# Altium PCB imx6_cpu_board.PcbDoc (part 6 of 9)
Units mil, origin at the board's own origin, x right, y up, seen from the top; angles counter-clockwise.
Board outline 2598.43 x 2362.2 mil, 8 copper layers (Top Layer, GND1, Signal Layer 1, POWER1, POWER2, Signal Layer 2, GND2, Bottom Layer), stack 66.304 mil thick; 354 components, 422 nets, 2180 pads, 1333 vias.
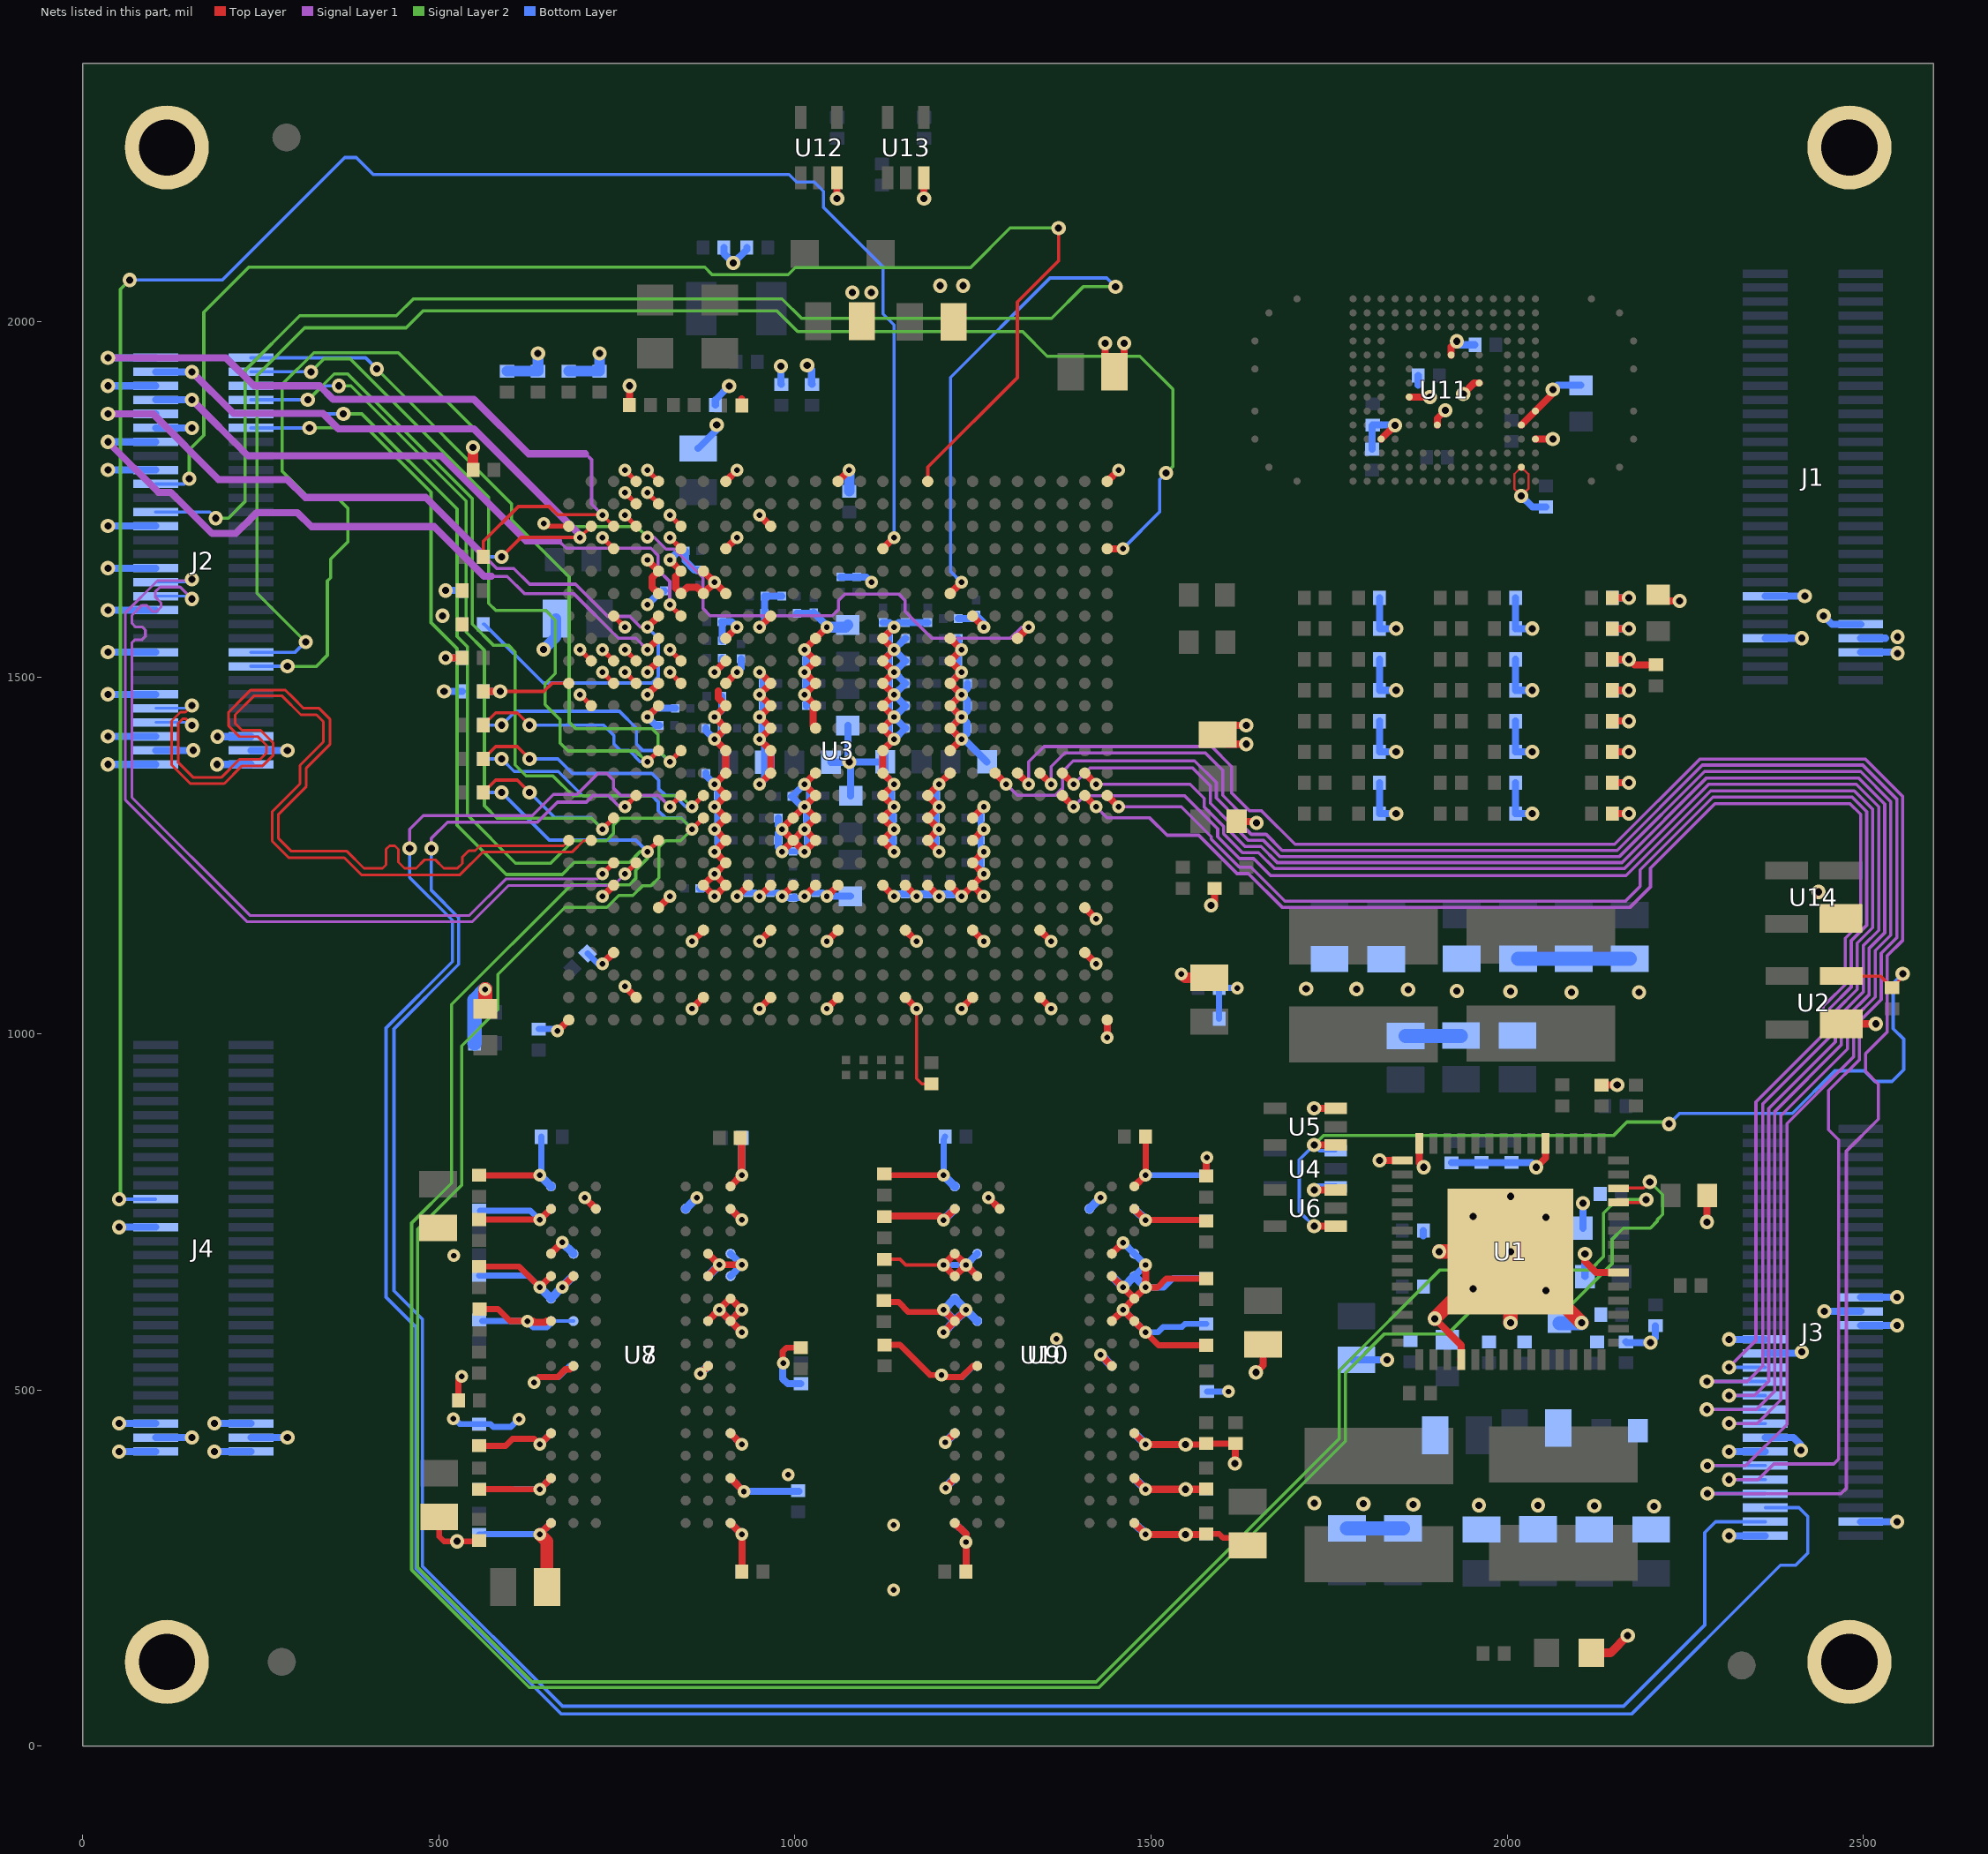
[diagram p12: the nets of this part, all layers, seen from the top]

## Via types
v1: diameter 18, hole 8, Top Layer to Bottom Layer, tented both sides, 768 vias
v2: diameter 20, hole 10, Top Layer to Bottom Layer, tented both sides, 565 vias

## Nets (pads, with @x,y where several pads share a name; then routed paths per layer and width w, separated by ;. In a path a pad name is that pad's centre, name@x,y a point inside that pad or via, vN(x,y) a via of type N, cw(c..) or ccw(c..) an arc to the next point about the centre after c; other vN are vias at no path point) (continued)
GND: C1.2 C2.2 C3.2 C4.2 C5.2 C6.2 C7.2 C9.2 C10.2 C11.2 C12.2 C13.2 C14.2 C15.2 C16.2 C17.2 C18.2 C19.2 C20.2 C21.2 C22.2 C23.2 C24.2 C25.2 C26.2 C27.2 C28.2 C29.2 C30.2 C31.2 C32.2 C33.2 C34.2 C35.2 C36.2 C37.1 C38.2 C39.2 C40.2 C41.2 C42.2 C43.2 C44.2 C45.2 C46.2 C47.2 C48.2 C49.2 C50.2 C51.2 C52.2 C53.2 C54.2 C55.2 C56.2 C57.2 C58.2 C59.2 C60.2 C61.2 C62.2 C63.2 C64.2 C65.2 C66.2 C67.2 C68.2 C69.2 C70.2 C71.2 C72.2 C73.2 C74.2 C75.2 C76.2 C77.2 C78.2 C79.2 C80.2 C81.2 C82.2 C83.2 C84.2 C85.2 C86.2 C87.2 C88.2 C89.2 C90.2 C91.2 C92.2 C93.2 C94.1 C95.2 C96.2 C97.2 C98.2 C99.2 C100.2 C101.2 C102.2 C103.2 C104.2 C105.2 C106.2 C107.2 C109.2 C110.2 C111.2 C112.1 C113.2 C114.2 C115.2 C116.2 C117.2 C118.2 C119.2 C120.2 C121.2 C122.2 C123.2 C124.2 C125.2 C126.2 C127.2 C128.2 C129.2 C130.2 C131.2 C132.2 C133.2 C134.2 C135.2 C136.2 C137.2 C138.2 C139.2 C140.2 C141.2 C142.2 C143.2 C144.2 C145.2 C146.2 C147.2 C148.2 C149.2 C150.2 C151.2 C152.2 C153.2 C154.2 C155.2 C156.2 C157.2 C158.2 C159.2 C160.2 C161.2 C162.2 C163.2 C164.2 C165.2 C166.2 C167.2 C168.2 C169.2 C170.2 C171.2 C172.2 C173.2 C174.2 C175.2 C176.2 C177.2 C178.2 C179.2 C180.2 C181.2 C182.2 C183.2 C184.2 C185.2 C186.2 C187.2 C188.2 C189.2 C190.2 C191.2 C192.2 C193.2 C194.2 C195.2 C196.2 C197.2 C198.2 C199.2 D1.2 J1.47 J1.52 J1.53 J1.54 J1.56 J2.5 J2.11 J2.17 J2.25 J2.31 J2.37 J2.43 J2.49 J2.55 J2.56 J2.57 J2.58 J2.59 J2.60 J3.26 J3.28 J3.30 J3.31 J3.33 J3.45 J3.47 J3.58 J3.59 J4.27 J4.55 J4.56 J4.57 J4.58 J4.59 J4.60 pad. pad.EndPad R4.1 R6.1 R13.2 R19.2 R20.2 R24.2 R25.1 R29.2 R30.1 R31.2 R32.2 R35.1 R36.1 R37.2 R38.2 R39.1 R40.2 R41.1 R64.1 R65.1 R66.1 R67.1 R68.2 R70.2 R72.2 R74.2 R76.2 R78.2 R80.2 R83.2 R85.2 R87.2 R89.2 R91.2 R93.2 R96.2 R98.2 R100.2 R102.2 R103.2 R104.2 R105.2 R107.2 R108.2 R109.2 R110.2 R111.2 R112.2 R113.2 R114.2 R115.2 R116.2 R117.2 R118.2 U1.5 U1.14 U1.15 U1.32 U1.48 U1.57 U2.1 U3.A4 U3.A5 U3.A8 U3.A13 U3.A25 U3.AA7 U3.AA10 U3.AA13 U3.AA16 U3.AA19 U3.AA22 U3.AB3 U3.AB24 U3.AD4 U3.AD7 U3.AD10 U3.AD13 U3.AD16 U3.AD19 U3.AD22 U3.AE1 U3.AE25 U3.B4 U3.B5 U3.C1 U3.C4 U3.C6 U3.C10 U3.D3 U3.D6 U3.D8 U3.E5 U3.E6 U3.E7 U3.F5 U3.F6 U3.F7 U3.F8 U3.G3 U3.G10 U3.G19 U3.H8 U3.H12 U3.H15 U3.H18 U3.J2 U3.J8 U3.J12 U3.J15 U3.J18 U3.K8 U3.K10 U3.K12 U3.K15 U3.K18 U3.L2 U3.L5 U3.L8 U3.L10 U3.L12 U3.L15 U3.L18 U3.M8 U3.M10 U3.M12 U3.M15 U3.M18 U3.N8 U3.N10 U3.N15 U3.N18 U3.P8 U3.P10 U3.P12 U3.P15 U3.P18 U3.R8 U3.R12 U3.R15 U3.R17 U3.T8 U3.T11 U3.T12 U3.T15 U3.T17 U3.T19 U3.U8 U3.U11 U3.U12 U3.U15 U3.U17 U3.U19 U3.V8 U3.V19 U3.W3 U3.W7 U3.W8 U3.W9 U3.W10 U3.W11 U3.W12 U3.W13 U3.W15 U3.W16 U3.W17 U3.W18 U3.W19 U3.Y5 U3.Y24 U4.3 U5.3 U6.3 U7.A9 U7.B1 U7.B3 U7.B9 U7.D1 U7.D8 U7.E1 U7.E2 U7.E8 U7.F9 U7.G1 U7.G8 U7.G9 U7.J2 U7.J8 U7.M1 U7.M9 U7.P1 U7.P9 U7.T1 U7.T9 U8.A9 U8.B1 U8.B3 U8.B9 U8.D1 U8.D8 U8.E1 U8.E2 U8.E8 U8.F9 U8.G1 U8.G8 U8.G9 U8.J2 U8.J8 U8.M1 U8.M9 U8.P1 U8.P9 U8.T1 U8.T9 U9.A9 U9.B1 U9.B3 U9.B9 U9.D1 U9.D8 U9.E1 U9.E2 U9.E8 U9.F9 U9.G1 U9.G8 U9.G9 U9.J2 U9.J8 U9.M1 U9.M9 U9.P1 U9.P9 U9.T1 U9.T9 U10.A9 U10.B1 U10.B3 U10.B9 U10.D1 U10.D8 U10.E1 U10.E2 U10.E8 U10.F9 U10.G1 U10.G8 U10.G9 U10.J2 U10.J8 U10.M1 U10.M9 U10.P1 U10.P9 U10.T1 U10.T9 U11.AA4 U11.AA6 U11.K4 U11.M7 U11.P5 U11.R10 U11.U8 U11.Y2 U11.Y5 U12.3 U13.3 U14.1 | length 18986.7
  Top Layer w3: 2009.89,1764.8 v2(2019.69,1755) 2029.49,1764.8 2029.49,1785.47 U11.Y2@2019.69,1795.27 2009.89,1785.47 2009.89,1764.8
  Top Layer w4.7: v1(1170.62,1035.14) 1170.62,937.1 1178.14,929.58 R40.2@1191.38,929.58
  Top Layer w5: C169.2@1125.38,683.1 1147.62,683.1 1155.4,675.32 v1(1208.65,675.32)
  Top Layer w7: v1(647.07,1716.16) 650.93,1712.3 U3.C1@682.43,1712.3 ; v1(698.17,1476.08) U3.L2@713.92,1460.33 ; v1(698.17,1539.07) U3.J2@713.92,1523.32 ; v1(729.67,1696.55) U3.D3@745.42,1680.8 ; U3.G3@745.42,1586.32 v1(761.17,1570.57) ; v1(761.17,1728.05) U3.C4@776.92,1712.3 ; v1(761.17,1759.55) U3.B4@776.92,1743.8 ; v1(761.17,1791.04) U3.A4@776.92,1775.29 ; v1(792.66,1759.55) U3.B5@808.41,1743.8 ; v1(792.66,1791.04) U3.A5@808.41,1775.29 ; v1(824.16,1696.55) U3.D6@839.91,1680.8 ; v1(824.16,1728.05) U3.C6@839.91,1712.3
  Top Layer w8: C184.2@500.38,321.63 500.38,294.13 507.17,287.34 v2(525.38,287.34) ; C136.2@1577.38,297.83 1595.38,297.83 1600.87,292.34 1624.67,292.34 C182.2@1635.38,281.63
  Top Layer w8.5: v2(525.38,287.34) 555.21,287.34 C149.2@556.45,288.58 ; C150.2@527.62,485.34 527.62,514.17 v1(532.33,518.89) ; C148.2@556.45,360.58 603.19,360.58 603.4,360.36 v1(641.72,360.36) ; C146.2@556.45,421.58 593.62,421.58 603.38,431.34 633.74,431.34 v1(641.72,423.36) ; C170.2@556.45,801.1 641.18,801.1 v1(641.64,801.56) ; C147.2@556.7,673.1 612.62,673.1 v1(641.64,644.08) ; C151.2@556.7,739.1 641.1,739.1 v1(641.64,738.57) ; C132.2@557.19,613.36 582.9,613.36 599.68,596.58 v1(624.28,596.58) ; v1@982.88,537.24 982.88,554.1 987.88,559.1 R35.1@1008.1,559.1 ; C131.2@1125.38,623.1 1145.37,623.1 1159.13,609.34 1205.66,609.34 v1(1208.65,612.33) ; C171.2@1125.38,803.1 1127.17,801.31 v1(1208.65,801.31) ; R39.1@1125.7,563.1 1147.12,563.1 1189.38,520.84 v1(1205.65,520.84) ; v1(1492.11,580.84) 1510.37,562.58 C135.2@1577.38,562.58 ; v1(1492.11,643.83) 1508.87,643.83 1521.14,656.1 C134.2@1577.38,656.1 ; v1(1492.11,738.32) 1576.16,738.32 C139.2@1577.38,737.1 ; v1(1492.11,801.31) 1492.38,801.58 1492.38,852.1 C153.2@1492.14,855.34 ; v2(1548.38,423.36) 1576.16,423.36 C133.2@1577.38,424.58 R41.1@1618.38,424.58
  Top Layer w9: v1(633.38,510.34) 641.13,518.09 667.13,518.09 677.73,528.69 684.06,528.69 U8.J2@688.95,533.6 ; v1(893.62,675.58) 903.01,675.58 915.86,675.57 v1(925.12,675.58) ; v1(1205.65,520.84) 1208.55,517.94 1233.89,517.94 1249.54,533.59 U10.J2@1255.88,533.6
  Top Layer w10: v2(509.28,1527.58) R29.2@532.9,1527.58 ; v1(624.28,596.58) 632.18,596.58 634.18,594.58 649.1,594.58 651.1,596.58 U8.G1@657.46,596.59 ; v1(641.64,644.08) 657.14,659.58 U8.E1@657.46,659.59 ; v1(641.64,738.57) 657.14,754.06 U8.B1@657.46,754.07 ; v1(641.72,297.37) U8.T1@657.46,313.13 ; v1(641.72,360.36) U8.P1@657.46,376.12 ; v1(641.72,423.36) U8.M1@657.46,439.11 ; U8.D1@657.46,691.08 657.47,691.4 v1(673.14,707.07) ; v1(666.68,1003.64) U3.AE1@682.43,1019.39 ; v1(673.14,644.08) 688.63,659.58 U8.E2@688.95,659.59 ; v1(704.78,769.79) U8.B3@720.46,754.11 ; v1(729.67,1098.13) U3.AB3@745.42,1113.88 ; v1(729.67,1192.62) U3.W3@745.42,1208.36 ; v1(761.18,1066.26) 776.55,1050.88 U3.AD4@776.92,1050.88 ; C118.2@767.72,1882.28 v2(767.72,1909.44) ; v1(792.66,1444.58) U3.L5@808.41,1460.33 ; v1(792.66,1665.06) U3.E5@808.41,1649.31 799.43,1640.34 799.43,1626.79 U3.F5@808.41,1617.81 ; U3.Y5@808.41,1176.87 v1(824.16,1192.62) ; v1(824.16,1665.06) U3.E6@839.91,1649.31 832.5,1641.91 832.5,1625.22 U3.F6@839.91,1617.81 848.89,1626.79 862.42,1626.79 U3.F7@871.4,1617.81 v1(887.15,1633.56) ; v1(855.66,1035.14) U3.AD7@871.4,1050.88 ; v1(855.66,1129.62) 871.4,1144.87 U3.AA7@871.4,1145.37 ; v1(867.19,522.84) U8.J8@877.93,533.6 ; U3.E7@871.4,1649.31 v1(887.15,1633.56) ; U8.G8@877.93,596.59 877.94,596.9 v1(893.62,612.58) ; U8.E8@877.93,659.59 877.94,659.89 v1(893.62,675.58) 878.13,691.07 U8.D8@877.93,691.08 ; v1(887.16,1507.57) U3.J8@902.91,1523.32 ; 892.03,1480.96 892.03,1471.2 U3.L8@902.9,1460.33 v1(887.15,1444.58) U3.M8@902.9,1428.84 v1(887.15,1413.09) U3.N8@902.9,1397.34 U3.P8@902.9,1365.84 v1(887.15,1350.1) U3.R8@902.9,1334.35 v1(887.15,1318.6) U3.T8@902.9,1302.85 v1(887.15,1287.1) U3.U8@902.9,1271.36 v1(887.15,1255.61) U3.V8@902.9,1239.86 v1(887.15,1224.11) ; U3.K8@902.9,1491.83 v1(918.65,1507.58) ; U3.H8@902.9,1554.82 v1(918.65,1570.57) ; U3.F8@902.9,1617.81 v1(887.15,1633.56) ; U3.D8@902.91,1680.8 v1(918.66,1696.55) ; U3.A8@902.9,1775.29 v1(918.65,1791.04) ; U8.T9@909.42,313.13 v1(925.18,297.37) 925.62,296.94 C166.2@925.62,244.94 ; U8.P9@909.42,376.12 v1(928.19,357.35) ; U8.M9@909.42,439.11 v1(925.18,423.36) ; U8.B9@909.42,754.07 909.62,754.06 v1(925.12,738.56) ; U8.A9@909.42,785.57 909.43,785.87 v1(925.12,801.56) 925.12,851.83 C167.2@923.21,853.74 ; v1(918.65,1192.62) U3.W9@934.4,1208.36 ; v1(925.12,581.09) 909.63,596.58 U8.G9@909.42,596.59 U8.G9@909.43,596.77 ; R30.1@925.2,1881.89 R30.1@925.2,1891.2 ; v1(950.14,1035.14) U3.AD10@965.89,1050.88 ; v1(950.14,1129.62) U3.AA10@965.89,1145.37 ; v1(950.14,1192.62) U3.W10@965.89,1208.36 ; v1(950.14,1350.1) U3.P10@965.89,1365.84 U3.N10@965.89,1397.34 v1(950.14,1413.09) U3.M10@965.89,1428.84 v1(950.14,1444.58) U3.L10@965.89,1460.33 v1(950.14,1476.08) U3.K10@965.89,1491.83 v1(950.14,1507.58) ; v1(950.13,1570.57) U3.G10@965.89,1586.32 ; v1(950.14,1728.05) U3.C10@965.89,1712.3 ; v1(981.64,1192.62) U3.W11@997.39,1208.36 ; v1(981.64,1255.61) U3.U11@997.39,1271.36 ; v1(1013.14,1192.62) U3.W12@1028.88,1208.36 ; U3.P12@1028.88,1365.84 v1(1013.14,1350.1) U3.R12@1028.88,1334.35 v1(1013.14,1318.6) ; U3.M12@1028.88,1428.84 1025.63,1432.09 1025.63,1457.08 U3.L12@1028.88,1460.33 v1(1013.14,1476.08) U3.K12@1028.88,1491.83 v1(1013.14,1507.58) U3.J12@1028.88,1523.32 v1(1013.14,1539.07) U3.H12@1028.88,1554.82 v1(1044.63,1570.57) ; v1(1044.63,1035.14) U3.AD13@1060.38,1050.88 ; v1(1044.63,1129.62) U3.AA13@1060.38,1145.37 ; v1(1044.63,1192.62) U3.W13@1060.38,1208.36 ; v2(1059.07,2172.3) U12.3@1059.07,2201.29 ; U3.A13@1060.38,1775.29 v1(1076.13,1791.04) ; C85.2@1080.72,2013.25 C85.2@1093.9,2000.07 C85.2@1107.12,2013.28 ; U3.W15@1123.37,1208.36 v1(1139.12,1192.62) ; U3.P15@1123.37,1365.84 U3.N15@1123.37,1397.34 v1(1139.12,1413.09) U3.M15@1123.37,1428.84 ; U3.P15@1123.37,1365.84 v1(1139.12,1350.1) U3.R15@1123.37,1334.35 v1(1139.12,1318.6) U3.T15@1123.37,1302.85 v1(1139.12,1287.1) U3.U15@1123.37,1271.36 v1(1139.12,1255.61) ; U3.M15@1123.37,1428.84 v1(1139.12,1444.58) U3.L15@1123.37,1460.33 v1(1139.12,1476.08) U3.K15@1123.37,1491.83 v1(1139.12,1507.58) U3.J15@1123.37,1523.32 v1(1139.12,1539.07) U3.H15@1123.37,1554.82 v1(1139.12,1570.57) ; C168.2@1125.38,744.06 1202.91,744.06 v1(1208.65,738.32) U10.B1@1224.39,754.07 ; U3.AD16@1154.87,1050.88 v1(1170.62,1035.14) ; U3.AA16@1154.87,1145.37 v1(1170.62,1129.62) ; U3.W16@1154.87,1208.36 v1(1170.62,1192.62) ; v2(1181.12,2172.3) U13.3@1181.12,2201.29 ; U3.W17@1186.36,1208.36 v1(1202.11,1192.62) ; v1(1202.11,1255.61) U3.U17@1186.36,1271.36 v1(1202.11,1287.1) U3.T17@1186.36,1302.85 v1(1202.11,1318.6) U3.R17@1186.36,1334.35 v1(1202.11,1350.1) U3.P18@1217.86,1365.84 ; v1(1208.65,580.84) U10.G1@1224.39,596.59 ; v1(1208.65,612.33) U10.G1@1224.39,596.59 ; v1(1210.65,426.31) U10.M1@1224.39,439.11 ; v1(1211.38,362.34) U10.P1@1224.39,376.12 ; U3.W18@1217.86,1208.36 v1(1233.61,1192.62) U3.W19@1249.36,1208.36 ; U3.N18@1217.86,1397.34 v1(1233.61,1413.09) U3.M18@1217.86,1428.84 v1(1233.61,1444.58) U3.L18@1217.86,1460.33 v1(1233.61,1476.08) U3.K18@1217.86,1491.83 v1(1233.61,1507.58) U3.J18@1217.86,1523.32 v1(1233.61,1539.07) U3.H18@1217.86,1554.82 ; C114.2@1222.66,1999.23 C114.2@1235.88,2012.45 ; U10.T1@1224.39,313.13 1240.14,297.37 v1(1240.14,286.34) 1240.14,245.18 C137.2@1239.9,244.94 ; v1(1233.61,1035.14) U3.AD19@1249.36,1050.88 ; v1(1240.14,612.33) U10.G1@1224.39,596.59 ; U3.AA19@1249.36,1145.37 v1(1265.1,1129.62) ; U3.U19@1249.36,1271.36 v1(1265.1,1287.1) ; U3.T19@1249.36,1302.85 v1(1265.1,1318.6) ; U3.G19@1249.36,1586.32 v1(1265.11,1570.56) ; U10.E2@1255.88,659.59 v1(1240.14,675.32) ; v1(1265.1,1192.62) U3.W19@1249.36,1208.36 ; v1(1265.1,1255.61) U3.V19@1249.36,1239.86 v1(1265.1,1224.11) U3.W19@1249.36,1208.36 ; v1(1271.64,769.81) U10.B3@1287.38,754.07 ; U3.AD22@1343.84,1050.88 v1(1359.59,1035.14) ; U3.AA22@1343.84,1145.37 v1(1359.59,1129.62) ; U3.AB24@1406.84,1113.88 1406.91,1113.88 v1(1422.58,1098.2) ; U3.Y24@1406.84,1176.87 v1(1422.58,1161.12) ; v1(1429.12,549.34) U10.J8@1444.86,533.6 ; v2(1435.47,1969.29) 1435.47,1942.34 C97.2@1448.65,1929.15 1461.87,1942.37 v2(1461.87,1969.29) ; v1(1438.33,994.8) U3.AE25@1438.33,1019.39 ; U3.A25@1438.33,1775.29 v1(1454.08,1791.04) ; U10.G8@1444.86,596.59 v1(1460.62,612.33) ; U10.E8@1444.86,659.59 v1(1460.62,643.83) U10.F9@1476.35,628.09 ; U10.D8@1444.86,691.08 v1(1460.62,706.82) ; U10.T9@1476.35,313.13 v1(1492.11,297.37) 1492.66,296.83 v2(1548.38,296.83) 1576.38,296.83 C136.2@1577.38,297.83 ; U10.P9@1476.35,376.12 v1(1492.11,360.36) v2(1548.38,360.36) 1576.91,360.36 C138.2@1577.38,360.83 ; U10.M9@1476.35,439.11 v1(1492.11,423.36) v2(1548.38,423.36) ; U10.B9@1476.35,754.07 v1(1492.11,738.32) ; U10.A9@1476.35,785.57 v1(1492.11,801.31) ; v1(1492.11,580.84) U10.G9@1476.35,596.59 v1(1460.62,612.33) ; v1(1492.11,675.32) 1492.11,666.46 1492.36,666.2 1492.36,652.95 1492.11,652.7 v1(1492.11,643.83) U10.F9@1476.35,628.09 ; C152.2@1577.38,800.1 1577.38,825.34 v1(1578.38,826.34) ; v2(1584,1180) 1588.65,1180 1589,1180.35 R13.2@1589,1203.95 ; v2(1617.33,396.39) 1618.38,397.43 R41.1@1618.38,424.58 ; C77.2@1620,1298 1645.47,1298 v2@1647.47,1296 ; v2(1633.36,1406.44) 1606.45,1406.44 C96.2@1593.23,1419.66 1606.41,1432.84 v2(1633.36,1432.84) ; v2(1647,524.49) 1657,534.49 C145.2@1657,563.82 ; v2(1728.74,780.81) U6.3@1758.99,780.81 ; v2(1728.74,894.98) U5.3@1758.99,894.98 ; v2(1820.54,822.09) U1.15@1852.72,822.09 ; U11.K4@1822.84,1834.64 v2(1842.2,1854) ; U11.M7@1862.21,1893.7 v2(1891.3,1893.7) ; U1.14@1876.42,845.79 1876.42,818.63 v2(1882.52,812.52) ; v2(1898,600) 1935.47,562.53 U1.32@1935.47,542.49 U1.32@1934.96,543 ; U11.P5@1901.58,1854.33 1901.58,1863.58 v2(1913,1875) ; U11.R10@1921.26,1952.75 1921.26,1964.13 v2(1929.13,1972) ; v2(1938,1898) 1953.38,1913.38 U11.U8@1960.63,1913.38 ; U11.Y5@2019.69,1854.33 U11.AA6@2039.37,1874.01 2063.86,1898.5 v2(2063.86,1904) ; U11.AA4@2039.37,1834.64 v2(2063.86,1834.64) ; v2(2040.61,812.52) 2053.58,825.49 U1.5@2053.58,845.79 ; v2(2109,690.84) 2109,680.1 2124.49,664.61 U1.48@2156.02,664.61 ; R4.1@2132.32,927.99 v2(2154.2,927.99) ; R112.2@2147.63,1308.82 v2(2170.74,1308.82) ; R114.2@2147.63,1352.13 v2(2170.74,1352.13) ; R113.2@2147.63,1395.43 v2(2170.74,1395.43) ; R104.2@2147.63,1438.74 v2(2170.74,1438.74) ; R108.2@2147.63,1482.05 v2(2170.74,1482.05) ; R103.2@2147.63,1525.35 v2(2170.74,1525.35) 2178.39,1517.71 C195.2@2208.66,1517.71 ; R109.2@2147.63,1568.66 v2(2170.74,1568.66) ; R118.2@2147.63,1611.97 v2(2170.74,1611.97) ; C193.2@2212,1616.18 2220.51,1607.67 v2(2242,1607.67) ; v2(2280.35,735.65) C2.2@2280.35,772.88 ; U14.1@2458.52,1162 U14.1@2468,1162 ; U2.1@2468.57,1013.81 v2(2517.19,1013.81) ; v1(887.15,1224.11) U3.W7@871.4,1208.36 v1(887.15,1192.62) U3.W8@902.9,1208.36 v1(887.15,1224.11) ; v1(893.62,612.58) U8.G9@909.43,596.77 ; v1(893.62,612.58) 909.12,628.08 U8.F9@909.42,628.09 924.93,612.58 v1(925.12,612.58) 909.43,596.89 U8.G9@909.43,596.77 ; U3.U11@997.39,1271.36 v1(1013.14,1287.1) ; U3.U11@997.39,1271.36 v1(981.64,1287.1) v1(1013.14,1318.6) ; U3.U11@997.39,1271.36 v1(1013.14,1255.61) U3.U12@1028.88,1271.36 v1(1013.14,1287.1) ; v1(1013.14,1287.1) U3.T12@1028.88,1302.85 v1(1013.14,1318.6) ; v1(1240.14,675.32) U10.E1@1224.39,659.59 v1(1208.65,675.32) U10.D1@1224.39,691.08 v1(1240.14,675.32) ; v1(1460.62,612.33) U10.F9@1476.35,628.09
  Top Layer w12: D1.2@2117.99,131 2145,131 v2(2169,155)
  Top Layer w15: R32.2@548,1791.34 v2(548,1823.17) ; v1(1542.15,1083.84) 1547.66,1078.33 C165.2@1581.52,1078.33
  Top Layer w18: v1(641.72,297.37) 651.8,287.29 C183.2@651.8,223.05
  Top Layer w20: C191.2@565.18,1034.93 v1(565.18,1062.39) ; v2(1898,600) U1.57@1992.14,694.14 ; v2(1904.37,694.14) U1.57@1992.14,694.14 ; v2(1952,641.77) v2(2004.37,694.14) ; v2(2004.37,594.14) v2(2004.37,694.14) ; v2(2104.37,594.14) v2(2004.37,694.14) ; U1.57@1992.14,694.14 v2(2004.37,694.14)
  Bottom Layer w5: U7.G9@657.47,596.59 U7.G8@688.96,596.59
  Bottom Layer w8.5: v1(520.38,459.34) 521.88,459.34 529.12,452.1 C128.2@556.45,452.1 572.33,452.1 576.58,447.85 601.3,447.85 v1(612.33,458.89) ; R36.1@527.62,485.34 527.62,514.17 v1(532.33,518.89) ; C158.2@556.38,297.08 564.58,297.37 v1(641.72,297.37) ; C157.2@556.38,360.58 560.59,360.36 v1(641.72,360.36) ; C156.2@556.45,660.58 625.14,660.58 v1(641.64,644.08) ; C154.2@557.9,751.67 628.54,751.67 v1(641.64,738.57) 641.98,738.57 U7.B9@657.47,754.07 ; C155.2@560.97,596.58 v1(624.28,596.58) ; R38.2@639.99,1006.47 663.85,1006.47 v1(666.68,1003.64) ; v1(641.64,801.56) 643.69,803.61 C181.2@643.62,855.27 ; C130.2@708.69,1112.59 723.15,1098.13 v1(729.67,1098.13) ; v1(918.65,1192.62) 923.89,1197.86 C189.2@934.28,1197.86 944.9,1197.86 v1(950.14,1192.62) 955.38,1197.86 C177.2@965.77,1197.86 976.4,1197.86 v1(981.64,1192.62) 983.49,1190.78 C173.2@996.87,1190.78 ; v1(981.64,1255.61) 982.07,1256.04 C186.2@997.27,1256.04 1012.71,1256.04 v1(1013.14,1255.61) ; C173.2@998.72,1192.62 C173.2@996.87,1190.78 ; v1(1044.63,1192.62) 1039.39,1197.86 C185.2@1028.76,1197.86 1018.38,1197.86 v1(1013.14,1192.62) 1011.29,1190.78 C173.2@996.87,1190.78 ; v1(1208.65,801.31) 1208.65,851.37 C160.2@1210.62,855.34 ; v1(1265.1,1224.11) 1260.41,1228.8 C172.2@1260.41,1240.14 1260.41,1250.93 v1(1265.1,1255.61) 1260.41,1260.3 C188.2@1260.41,1271.64 1260.41,1282.42 v1(1265.1,1287.1) 1260.41,1291.79 C187.2@1260.41,1303.14 1260.41,1313.92 v1(1265.1,1318.6) ; v1(1492.11,580.84) 1509.38,580.84 1516.9,588.35 1543.08,588.35 1547.33,592.6 C127.2@1577.38,592.6 ; v1(1492.11,643.83) 1517.87,643.83 1530.64,656.6 C162.2@1577.38,656.6 ; v1(1492.11,738.32) 1573.17,738.32 C161.2@1577.38,737.1 ; v1(1492.11,801.31) 1573.18,801.31 C142.2@1577.38,800.1 ; v2(1548.38,360.36) 1573.92,360.36 C164.2@1577.38,360.83 ; C163.2@1578.38,497.58 v1(1608.64,497.58) ; C159.2@1595.29,1020.85 C143.2@1595.29,1064.16 v1(1620.89,1064.16)
  Bottom Layer w9: v1(633.38,510.34) 641.13,518.09 668.13,518.09 683.63,533.59 U7.J8@688.96,533.6 ; v1(1205.65,520.84) 1208.4,518.09 1234.78,518.09 1250.28,533.59 U9.J8@1255.89,533.6 ; v1(1208.65,675.32) v1(1240.14,675.32)
  Bottom Layer w10: v2(35.43,1377.95) J2.59@102.36,1377.95 ; v2(35.43,1417.32) J2.55@102.36,1417.32 ; v2(35.43,1476.38) J2.49@102.36,1476.38 ; v2(35.43,1535.43) J2.43@102.36,1535.43 ; v2(35.43,1594.49) J2.37@102.36,1594.49 ; v2(35.43,1653.54) J2.31@102.36,1653.54 ; v2(35.43,1712.6) J2.25@102.36,1712.6 ; v2(35.43,1791.34) J2.17@102.36,1791.34 ; v2(35.43,1909.45) J2.5@102.36,1909.45 ; v2(51.18,413.39) J4.59@102.36,413.39 ; v2(51.18,452.76) J4.55@102.36,452.76 ; v2(51.18,728.35) J4.27@102.36,728.35 ; J4.57@102.36,433.07 v2(153.54,433.07) ; J2.57@102.36,1397.64 154.8,1397.64 v2(155,1397.84) ; J2.11@102.36,1850.39 v2(153.54,1850.39) ; v2(185.04,413.39) J4.60@236.22,413.39 ; v2(185.04,452.76) J4.56@236.22,452.76 ; v2(188.76,1377.95) J2.60@236.22,1377.95 ; v2(189.07,1417.01) 236.54,1417.01 J2.56@236.22,1417.32 ; J4.58@236.22,433.07 v2(287.4,433.07) ; J2.58@236.22,1397.64 v2(287.4,1397.64) ; v2(507.3,1480.34) C112.1@532.9,1480.34 ; v2(509.28,1527.58) R31.2@532.9,1527.58 ; v2(509.28,1622.07) R19.2@532.9,1622.07 ; v1(624.28,596.58) 632.52,588.34 651.38,588.34 657.47,594.43 U7.G9@657.47,596.59 ; v1(641.72,297.37) U7.T9@657.47,313.13 ; v1(641.72,360.36) U7.P9@657.47,376.12 ; v1(641.72,423.36) U7.M9@657.47,439.11 ; U7.F9@657.39,628.33 U7.F9@657.47,628.09 ; v1(792.66,1602.07) 812.26,1621.67 C125.2@816.6,1621.67 ; C116.2@809.52,1432.7 804.54,1432.7 v1(792.66,1444.58) 804.79,1456.71 C113.2@831.96,1456.71 ; v1(824.16,1665.06) 836.67,1677.58 C100.2@846.13,1677.58 846.13,1663.87 859,1651 C124.2@866,1651 ; C101.2@864,1821.52 890.1,1847.62 v2(890.1,1854.6) ; C123.2@866.12,1203.96 875.81,1203.96 v1(887.15,1192.62) ; C104.2@874.78,1365.77 874.78,1362.47 v1(887.15,1350.1) 892.19,1345.06 C44.2@892.19,1334.27 892.19,1323.65 v1(887.15,1318.6) 892.59,1313.17 C57.2@892.59,1302.78 892.59,1292.54 v1(887.15,1287.1) 892.59,1281.67 C58.2@892.59,1271.28 892.59,1261.05 v1(887.15,1255.61) ; C87.2@874.78,1428.76 874.78,1425.46 v1(887.15,1413.09) 897.7,1423.65 C43.2@897.7,1428.76 ; v1(887.15,1444.58) 897.23,1454.66 C86.2@897.23,1473.64 ; v1(887.16,1507.57) 897.62,1518.03 C105.2@897.62,1527.19 ; C117.2@888.22,1882.4 888.22,1889.62 v2(907.5,1908.9) ; v1(893.62,612.58) U7.G1@909.43,596.77 ; C106.2@897.62,1551.6 897.62,1577.97 C122.2@897.23,1578.37 910.85,1578.37 v1(918.65,1570.57) ; C120.2@900.12,2103.6 900.12,2095.08 v2(913.4,2081.8) 932.38,2100.78 C119.2@932.38,2103.6 ; U7.T1@909.43,313.13 v1(925.18,297.37) 925.62,296.94 C129.2@925.62,244.94 ; U7.P1@909.43,376.12 v1(928.19,357.35) C179.2@1005.45,357.35 ; U7.M1@909.43,439.11 v1(925.18,423.36) ; U7.E1@909.43,659.59 909.43,659.89 v1(925.12,675.58) 909.63,691.07 U7.D1@909.43,691.08 ; U7.B1@909.43,754.07 924.93,738.56 v1(925.12,738.56) ; v1(918.65,1507.58) 924.24,1513.17 C84.2@924.24,1526.25 ; v1(925.12,581.09) 909.63,596.58 U7.G1@909.43,596.59 U7.G1@909.43,596.77 ; v1(925.12,612.58) 909.43,596.89 U7.G1@909.43,596.77 ; v1(925.12,801.56) 925.12,852.72 C178.2@926.14,853.74 ; v1(950.14,1350.1) 957.46,1357.42 C49.2@957.46,1381.12 957.46,1405.78 v1(950.14,1413.09) 954.79,1417.75 C53.2@954.79,1428.76 954.79,1439.93 v1(950.14,1444.58) 955.18,1449.63 C40.2@955.18,1460.26 955.18,1471.04 v1(950.14,1476.08) 955.18,1481.13 C52.2@955.18,1491.75 955.18,1502.54 v1(950.14,1507.58) ; v1(950.13,1570.57) 957.07,1577.51 C91.2@957.07,1590.18 957.07,1613.8 C115.2@957.46,1614.19 C94.1@981.32,1614.19 ; C63.2@976.36,1302.78 976.36,1292.38 v1(981.64,1287.1) 976.36,1281.82 C61.2@976.36,1271.28 976.36,1261.76 v1@982.07,1256.04 ; v2(980.32,1937.01) 980.32,1912.05 C111.2@980.93,1911.43 ; v1@982.88,537.24 982.88,515.7 990.1,508.48 R37.2@1008.1,508.48 ; C90.2@1002.74,1590.18 1025.18,1590.18 C88.2@1026.2,1591.21 1044.63,1572.78 v1(1044.63,1570.57) ; v1@1012.71,1256.04 1018.18,1261.51 C62.2@1018.18,1271.28 1018.18,1282.07 v1(1013.14,1287.1) 1017,1290.96 C60.2@1017,1303.17 1017,1314.75 v1(1013.14,1318.6) ; v1(1013.14,1476.08) v1@1015.81,1478.76 ; v1(1013.14,1507.58) v1@1015.81,1510.26 ; v1(1013.14,1539.07) 1015.81,1536.4 C39.2@1015.81,1523.25 v1@1015.81,1510.26 ; C41.2@1016.21,1460.26 1016.21,1478.37 v1@1015.81,1478.76 ; v2(1017,1938) 1023.23,1931.77 1023.23,1912.05 C121.2@1023.84,1911.43 ; v1(1044.63,1192.62) 1044.94,1192.94 C190.2@1077.78,1192.94 ; C42.2@1050.27,1381.12 v2@1076.85,1381.12 ; C110.2@1064,1641.12 C109.2@1086.83,1641.12 1100.07,1641.12 v1(1107.63,1633.56) ; C54.2@1074.24,1432.7 1074.24,1383.74 v2(1076.38,1381.59) v2@1076.85,1381.12 ; C66.2@1078.17,1333.88 v2@1078.17,1379.8 ; C92.2@1123.45,1577.03 1132.66,1577.03 v1(1139.12,1570.57) ; v1(1139.12,1192.62) 1142.78,1196.29 C176.2@1154.75,1196.29 1166.95,1196.29 v1(1170.62,1192.62) 1173.89,1195.89 C175.2@1186.24,1195.89 C174.2@1218.13,1195.89 1230.34,1195.89 v1(1233.61,1192.62) ; v1(1139.12,1255.61) 1136.99,1257.74 C65.2@1136.99,1271.28 1136.99,1284.97 v1(1139.12,1287.1) 1136.99,1289.23 C64.2@1136.99,1302.78 1136.99,1316.47 v1(1139.12,1318.6) 1134.63,1323.1 C56.2@1134.63,1334.27 1134.63,1345.61 v1(1139.12,1350.1) 1126.6,1362.62 C75.2@1126.6,1381.52 ; C71.2@1155.18,1554.75 1154.79,1554.75 v1(1139.12,1539.07) ; C98.2@1186.44,1577.03 C99.2@1154.95,1577.03 1145.58,1577.03 v1(1139.12,1570.57) ; v1(1202.11,1255.61) 1197.22,1260.5 C67.2@1197.22,1270.89 1197.22,1282.22 v1(1202.11,1287.1) 1197.22,1291.99 C73.2@1197.22,1302.78 1197.22,1313.72 v1(1202.11,1318.6) 1197.62,1323.09 C74.2@1197.62,1334.27 1197.62,1345.61 v1(1202.11,1350.1) ; U9.T9@1224.4,313.13 1240.14,297.37 v1(1240.14,286.34) 1240.14,245.18 C126.2@1239.9,244.94 ; C78.2@1229.11,1554.75 1229.11,1543.57 v1(1233.61,1539.07) 1228.72,1534.19 C80.2@1228.72,1523.25 1228.72,1512.47 v1(1233.61,1507.58) 1220.06,1494.04 C81.2@1220.06,1491.75 1220.06,1489.63 v1(1233.61,1476.08) ; C107.2@1229.11,1582.7 1249.19,1582.7 C102.2@1254.16,1587.66 1265.11,1576.71 v1(1265.11,1570.56) ; C93.2@1242.19,1491.75 1242.19,1484.67 v1(1233.61,1476.08) ; U9.E8@1255.89,659.59 v1(1240.14,675.32) U9.D8@1255.89,691.08 ; C83.2@1269.51,1381.52 1237.93,1413.09 v1(1233.61,1413.09) ; v1(1460.62,612.33) U9.G1@1476.36,596.59 v1(1492.11,580.84) ; v1(1460.62,706.82) U9.D1@1476.36,691.08 v1(1492.11,675.32) U9.E1@1476.36,659.59 ; v2(1548.38,296.83) 1576.38,296.83 C180.2@1577.38,297.83 ; C76.2@1620,1298 1646,1298 v2(1648,1296) ; v2(1728.74,780.81) 1732.65,784.72 U4.3@1758.99,784.72 ; C36.2@1782.88,542.17 C36.2@1788.22,542.17 v2(1831.07,542.17) ; C199.2@1810,1820.51 1810,1853.48 C198.2@1811,1854.48 1841.72,1854.48 v2(1842.2,1854) ; R98.2@1820.52,1352.16 R100.2@1820.52,1308.85 v2(1843.87,1308.85) ; R93.2@1820.52,1438.77 R83.2@1820.52,1395.46 v2(1843.87,1395.46) ; R80.2@1820.52,1482.08 R85.2@1820.52,1525.39 ; R70.2@1820.52,1568.69 R74.2@1820.52,1612 ; R80.2@1820.52,1482.08 v2(1843.87,1482.08) ; R70.2@1820.52,1568.69 v2(1843.87,1568.69) ; 1874.85,1910.15 C197.2@1874.85,1924 ; C32.2@1882.16,716.35 C32.2@1882.16,723.67 ; C30.2@1921.69,818.95 2034.18,818.95 v2(2040.61,812.52) ; v2(1929.13,1972) 1934.13,1967 C194.2@1954.48,1967 ; R87.2@2011.51,1352.14 R91.2@2011.51,1308.83 v2(2034.87,1308.83) ; R96.2@2011.51,1438.76 R89.2@2011.51,1395.45 v2(2034.87,1395.45) ; R78.2@2011.51,1525.37 R68.2@2011.51,1482.06 v2(2034.87,1482.06) ; R72.2@2011.52,1611.98 R76.2@2011.51,1568.68 v2(2034.87,1568.68) ; v2(2019.69,1755) 2035.3,1739.39 C196.2@2054.37,1739.39 ; v2(2063.86,1904) 2070.04,1910.18 C192.2@2103.34,1910.18 ; v2@2103.9,589.09 2103.9,593.67 v2(2104.37,594.14) ; C1.2@2106,727 v2(2106,762) ; C5.2@2109,659 v2(2109,690.84) ; R116.2@2147.63,1308.82 v2(2170.74,1308.82) ; R110.2@2147.63,1352.13 v2(2170.74,1352.13) ; R115.2@2147.63,1395.43 v2(2170.74,1395.43) ; R107.2@2147.63,1438.74 v2(2170.74,1438.74) ; R102.2@2147.63,1482.05 v2(2170.74,1482.05) ; R105.2@2147.63,1525.35 v2(2170.74,1525.35) ; R111.2@2147.63,1568.66 v2(2170.74,1568.66) ; R117.2@2147.63,1611.97 v2(2170.74,1611.97) ; C11.2@2166.57,567.36 2167.74,566.19 v2(2200.86,566.19) 2208,573.33 R6.1@2208,590 ; v2(2311.02,295.28) J3.59@2362.2,295.28 ; v2(2311.02,413.39) J3.47@2362.2,413.39 ; v2(2311.02,570.87) J3.31@2362.2,570.87 ; J3.45@2362.2,433.07 2401.75,433.07 2412,422.82 v2(2412,415) ; J3.33@2362.2,551.18 2411.46,551.18 v2(2413.39,553.1) ; J1.53@2362.2,1555.12 v2(2413.39,1555.12) ; J1.47@2362.2,1614.17 v2(2417.5,1614.17) ; v2(2444,1586.64) 2455.83,1574.8 J1.52@2496.06,1574.8 ; v2(2444.88,610.24) J3.28@2496.06,610.24 ; J3.58@2496.06,314.96 v2(2547.24,314.96) ; J3.30@2496.06,590.55 v2(2547.24,590.55) ; J3.26@2496.06,629.92 v2(2547.24,629.92) ; J1.56@2496.06,1535.43 2546.57,1535.43 v2(2548,1534) ; J1.54@2496.06,1555.12 2531.13,1555.12 ; v1(1013.14,1318.6) 1021.22,1326.68 C50.2@1021.22,1333.85 1021.22,1342.02 v1(1013.14,1350.1) 996.03,1333 C51.2@995.4,1333 1009.79,1318.6 v1(1013.14,1318.6) ; v1@1015.81,1478.76 C38.2@1015.81,1491.75 v1@1015.81,1510.26 ; v2@1076.85,1381.12 v2@1078.17,1379.8 ; v2@1078.17,1379.8 1079.89,1381.52 C75.2@1126.6,1381.52 ; C75.2@1126.6,1381.52 1126.6,1400.58 v1(1139.12,1413.09) ; v1(1139.12,1413.09) 1131.32,1420.89 C45.2@1131.32,1428.76 1131.32,1436.79 v1(1139.12,1444.58) ; v1(1139.12,1413.09) 1139.52,1413.09 C68.2@1155.18,1428.76 1154.94,1428.76 v1(1139.12,1444.58) ; v1(1139.12,1444.58) 1131.32,1452.38 C47.2@1131.32,1460.26 1131.32,1468.29 v1(1139.12,1476.08) ; v1(1139.12,1444.58) 1139.51,1444.58 C72.2@1155.18,1460.26 1154.94,1460.26 v1(1139.12,1476.08) ; v1(1139.12,1476.08) 1131.32,1483.88 C48.2@1131.32,1491.75 1131.32,1499.79 v1(1139.12,1507.58) 1131.32,1515.38 C46.2@1131.32,1523.25 1131.32,1531.28 v1(1139.12,1539.07) ; v1(1139.12,1476.08) 1139.52,1476.08 C69.2@1155.18,1491.75 1139.35,1507.58 1139.52,1507.58 C70.2@1155.18,1523.25 1139.36,1539.07 v1(1139.12,1539.07) ; v1(1139.12,1539.07) 1131.32,1546.87 C55.2@1131.32,1554.75 1131.32,1562.78 v1(1139.12,1570.57) ; v1(1233.61,1413.09) 1241.8,1421.28 C95.2@1241.8,1428.37 1241.8,1436.39 v1(1233.61,1444.58) ; v1(1233.61,1413.09) 1220.06,1426.64 C79.2@1220.06,1428.76 1220.06,1431.04 v1(1233.61,1444.58) ; v1(1233.61,1444.58) 1220.06,1458.13 C82.2@1220.06,1460.26 1220.06,1462.54 v1(1233.61,1476.08) ; v1(1233.61,1444.58) 1242.19,1453.17 C103.2@1242.19,1460.26 1242.19,1467.5 v1(1233.61,1476.08)
  Bottom Layer w12: v1(641.64,644.08) 657.39,628.33 v1(673.14,644.08) 688.63,659.58 U7.E8@688.96,659.59 ; v1(641.64,801.56) 657.47,785.73 U7.A9@657.47,785.57 ; v1(673.14,707.07) 688.96,691.24 U7.D8@688.96,691.08 ; U7.B3@846.44,754.07 846.44,754.15 v1(862.33,770.04) ; v1(867.19,522.84) U7.J2@877.94,533.6 ; U7.E2@877.94,659.59 877.94,659.89 v1(893.62,675.58) ; v1(1208.65,580.84) U9.G9@1224.4,596.59 ; v1(1208.65,738.32) U9.B9@1224.4,754.07 ; v1(1208.65,801.31) U9.A9@1224.4,785.57 ; v1(1210.65,426.31) U9.M9@1224.4,439.11 ; v1(1211.38,362.34) 1211.38,363.1 U9.P9@1224.4,376.12 ; U9.G8@1255.89,596.59 v1(1240.14,612.33) ; U9.B3@1413.37,754.07 v1(1429.12,769.81) ; v1(1429.12,549.34) U9.J2@1444.87,533.6 ; U9.E2@1444.87,659.59 v1(1460.62,643.83) U9.E1@1476.36,659.59 v1(1492.11,643.83) ; U9.T1@1476.36,313.13 v1(1492.11,297.37) ; U9.P1@1476.36,376.12 v1(1492.11,360.36) ; U9.M1@1476.36,439.11 v1(1492.11,423.36) ; U9.B1@1476.36,754.07 v1(1492.11,738.32) ; U9.G9@1224.4,596.59 v1(1240.14,612.33) ; U9.G9@1224.4,596.59 v1(1208.65,612.33) U9.F9@1224.4,628.09 v1(1240.14,612.33)
  Bottom Layer w15: R64.1@595.86,1930.11 R67.1@639.17,1930.11 v2(639.17,1954.95) ; v2(647.07,1539.39) 664.39,1556.71 C89.2@664.39,1582.7 ; R65.1@682.48,1930.11 R66.1@725.78,1930.11 v2(725.78,1954.95) ; v1(1044.63,1570.57) 1071.17,1570.57 C59.2@1074.24,1573.64 ; R24.2@1076.08,1761.52 v1@1076.08,1790.99
  Bottom Layer w20: C140.2@550.03,986.6 C141.2@550.03,1029.91 550.03,1047.24 v1(565.18,1062.39) ; C34.2@1774.84,305.56 C33.2@1853.58,305.56 ; C31.2@1857.12,996.9 C25.2@1934.68,996.9 ; C14.2@2015,1105.16 C17.2@2093.34,1105.16 C16.2@2171.69,1105.16 ; C4.2@2073.27,593.67 v2@2103.9,593.67
  other v1: 1138.38,219.34 1138.38,310.34 990.38,380.84 983.88,537.24 1367.24,571.37 521,688.34
  other v2: 2206,336.34 2122.08,337 1960.06,338 2043,338 1868,339 1798,340 1729,341.09 2054.37,639.38 2054.37,742 1952,743.35 2004.37,771.58 2090.16,1058.06 2184.68,1058.06 2004.37,1059.38 1929.13,1059.93 1860.68,1061.79 1788.22,1062.64 1717.52,1062.99 2437,1199 2548,1557 505.34,1586.64 1080.72,2040.2 1107.12,2040.2 1204,2050 1236,2050
GPS-PWREN: J2.44 U3.D25 | length 2128.6
  Top Layer w10: U3.D25@1438.33,1680.8 1460.42,1680.8 v1(1460.62,1681)
  Signal Layer 2 w4.5: v2(313,1550) 244.65,1618.35 244.65,1923.88 311.65,1990.87 454,1990.87 477.63,2014.5 974.81,2014.5 1003.85,1985.46 1319.54,1985.46 1354,1951 1484,1951 1530.34,1904.66 1530.34,1796.26 v2(1521.08,1787)
  Bottom Layer w4.7: J2.44@236.22,1535.43 298.43,1535.43 v2(313,1550) ; v1(1460.62,1681) 1512,1732.38 1512,1777.92 v2(1521.08,1787)
GPS-RESET: J2.46 U3.H21 | length 1895.6
  Top Layer w10: U3.H21@1312.35,1554.82 v1(1328.09,1570.57)
  Signal Layer 1 w4.5: v1(792.66,1696.88) 802.19,1696.88 818.81,1680.26 830.45,1680.26 870.85,1639.87 870.85,1596.88 880.85,1586.87 924.88,1586.87 925,1586.76 1052.25,1586.76 1061.2,1595.7 1061.2,1608.3 1070.18,1617.27 1145.43,1617.27 1154.32,1608.38 1154.32,1592.75 1191.75,1555.32 1302.92,1555.32 1318.17,1570.57 v1(1328.09,1570.57)
  Signal Layer 2 w4.5: v2(287.4,1515.75) 287.55,1515.6 328,1515.6 343.55,1531.15 343.55,1635.54 348,1639.99 348,1666.21 372.06,1690.27 372.06,1737.94 359,1751 318.75,1751 280.16,1789.59 280.16,1911.59 324.52,1955.95 443.1,1955.95 687.3,1711.75 777.79,1711.75 v1(792.66,1696.88)
  Bottom Layer w4.7: J2.46@236.22,1515.75 v2(287.4,1515.75)
HDMI-CLK_N: U3.J5 | length 22.3
  Top Layer w10: v1(792.66,1507.57) U3.J5@808.41,1523.32
HDMI-CLK_P: U3.J6 | length 22.3
  Top Layer w7: v1(824.16,1539.07) U3.J6@839.91,1523.32
HDMI-D0_N: U3.K5 | length 22.3
  Top Layer w10: v1(792.66,1476.08) U3.K5@808.41,1491.83
HDMI-D0_P: U3.K6 | length 22.3
  Top Layer w7: v1(824.16,1507.58) U3.K6@839.91,1491.83
HDMI-D1_N: U3.J3 | length 22.3
  Top Layer w7: v1(729.67,1539.07) U3.J3@745.42,1523.32
HDMI-D1_P: U3.J4 | length 22.3
  Top Layer w7: v1(761.17,1539.07) U3.J4@776.92,1523.32
HDMI-D2_N: U3.K3 | length 22.3
  Top Layer w7: v1(729.67,1507.58) U3.K3@745.42,1491.83
HDMI-D2_P: U3.K4 | length 22.3
  Top Layer w7: v1(761.17,1507.58) U3.K4@776.92,1491.83
HDMI-HDP: C112.2 R26.1 U3.K1 | length 148.4
  Top Layer w4.7: v2(586.04,1480.34) 647.39,1480.34 658.88,1491.83 U3.K1@682.43,1491.83
  Top Layer w10: R26.1@562.42,1480.34 v2(586.04,1480.34)
  Bottom Layer w10: C112.2@562.42,1480.34 v2(586.04,1480.34)
HEADPHONE-DET: J4.23 U3.D15 | length 2961.8
  Top Layer w10: U3.D15@1123.37,1680.8 v1(1139.12,1696.55)
  Signal Layer 2 w4.5: v2(51.18,767.72) 53,769.53 53,2045 v2(66,2058)
  Bottom Layer w4.7: v2(51.18,767.72) J4.23@102.36,767.72 ; v2(66,2058) 196,2058 368,2230 384,2230 408,2206 991.7,2206 1002.1,2195.6 1026.88,2195.6 1040,2182.48 1040,2160 1123.65,2076.35 1123.65,2010.37 1139.12,1994.9 v1(1139.12,1696.55)
HIZ-FOR-BOOT: R8.1 U2.2 U4.1 U5.1 U6.1 | length 1361.5
  Top Layer w4.7: U2.2@2468.57,1080.81 2523.65,1080.81 R8.1@2540,1064.45 2555,1079.45 v2(2555,1084)
  Top Layer w10: v2(1728.74,729.61) U6.1@1758.99,729.61 ; v2(1728.74,843.79) U5.1@1758.99,843.79
  Signal Layer 2 w4.5: v2(1728.74,843.79) 1741.88,856.92 2148.92,856.92 2167.93,875.93 2224.34,875.93 v2(2227,873.27)
  Bottom Layer w4.7: v2(1728.74,729.61) 1708,750.35 1708,823.04 v2(1728.74,843.79) 1736.61,835.91 U4.1@1758.99,835.91 ; v2(2227,873.27) 2241.73,888 2400,888 2460,948 2501,948 2516,933 2540,933 2556.3,949.3 2556.3,992.46 2541.7,1007.06 2541.7,1070.7 v2(2555,1084)
I2C1-SCL: J2.4 R14.2 U3.N5 | length 1289.9
  Top Layer w4.7: R14.2@562.42,1433.09 579.77,1450.44 610.04,1450.44 v2(627.39,1433.09)
  Top Layer w7: v1(792.66,1381.59) U3.N5@808.41,1397.34
  Signal Layer 2 w4.5: v2(320.62,1929.13) 338.98,1947.5 375.52,1947.5 570,1753.02 570,1604 580,1594 650,1594 663.32,1580.68 663.32,1505.49 649,1491.17 649,1462 670.2,1440.8 670.2,1408 681.36,1396.84 776.42,1396.84 791.67,1381.59 v1(792.66,1381.59)
  Bottom Layer w4.7: J2.4@236.22,1929.13 v2(320.62,1929.13) ; v2(627.39,1433.09) 731.37,1433.09 745.82,1418.65 745.82,1406.73 754.81,1397.74 766.72,1397.74 782.87,1381.59 v1(792.66,1381.59)
I2C1-SDA: J2.2 R12.2 U3.N6 | length 1302.4
  Top Layer w7: v1(824.16,1381.59) U3.N6@839.91,1397.34
  Signal Layer 2 w4.5: v2(413,1933) 602.18,1743.82 602.18,1721.82 682.92,1641.08 682.92,1437.27 691.85,1428.34 798.97,1428.34 807.91,1419.41 807.91,1397.84 v1(824.16,1381.59)
  Bottom Layer w4.7: J2.2@236.22,1948.82 397.18,1948.82 v2(413,1933) ; R12.2@562.42,1433.09 v2(588.02,1433.09) 607.7,1452.78 753.37,1452.78 777.31,1428.84 777.31,1406.73 786.38,1397.66 808.09,1397.66 v1(824.16,1381.59)
I2C2-SCL: J2.12 R16.2 U1.54 U3.U5 | length 4839.9
  Top Layer w4.7: U1.54@2156.02,782.72 2156.65,783.35 2191.35,783.35 v2(2200,792)
  Top Layer w7: v1(792.66,1255.61) U3.U5@808.41,1271.36
  Signal Layer 2 w4.5: v2(318.39,1850.39) 398.61,1850.39 489,1760 489,1577 525.53,1540.47 525.53,1292.47 594.5,1223.5 673.19,1223.5 690.05,1240.36 767.48,1240.36 782.73,1255.61 v1(792.66,1255.61) 792.66,1245.68 776.42,1229.44 776.42,1217.79 767.48,1208.86 685.86,1208.86 518,1041 518,790.34 461.75,734.09 461.75,247.42 626.97,82.2 1426.88,82.2 1772.5,427.82 1772.5,523.62 1827.47,578.59 1916.59,578.59 1948.39,610.39 2080.39,610.39 2147.1,677.1 2147.1,711.2 2163,727.1 2200.86,727.1 2210.38,736.62 2210.38,738.49 2218,746.11 2218,774 v2(2200,792)
  Bottom Layer w4.7: J2.12@236.22,1850.39 v2(318.39,1850.39) ; R16.2@562.42,1338.6 v2(588.02,1338.6) 654.95,1271.67 776.59,1271.67 v1(792.66,1255.61)
I2C2-SDA: J2.10 R15.2 U1.53 U3.T7 | length 4992.1
  Top Layer w4.7: U1.53@2156.02,763.04 2191.04,763.04 v2(2195,767)
  Top Layer w7: v1(855.65,1287.1) U3.T7@871.4,1302.85
  Signal Layer 2 w4.5: v2(366,1870.08) 391.92,1870.08 525.53,1736.47 525.53,1557.47 540,1543 540,1307 607.64,1239.36 657,1239.36 688.64,1271 735.13,1271 744.92,1280.78 744.92,1292.42 754.85,1302.35 840.4,1302.35 v1(855.65,1287.1) 839.41,1270.86 817.84,1270.86 808.91,1261.93 808.91,1218.79 797.97,1207.86 786.34,1207.86 772.48,1194 752.61,1194 735.98,1177.37 677.03,1177.37 583,1083.34 583,1033.89 532,982.89 532,787.34 470.25,725.59 470.25,250.94 631.19,90 1422.66,90 1764,431.34 1764,527.14 1904.86,668 2116,668 2135,687 2135,748 2154,767 v2(2195,767)
  Bottom Layer w4.7: J2.10@236.22,1870.08 v2(366,1870.08) ; R15.2@562.42,1385.85 v2(588.02,1385.85) 605.86,1368 667.65,1368 701.7,1333.95 799.01,1333.95 808.01,1324.96 808.01,1313.04 817.88,1303.17 839.58,1303.17 v1(855.65,1287.1)
I2C3-SCL: J2.8 R18.2 U3.R7 | length 1446.8
  Top Layer w4.7: R18.2@562.42,1385.85 579.77,1403.2 610.04,1403.2 v2(627.39,1385.85)
  Top Layer w7: v1(855.65,1318.6) U3.R7@871.4,1334.35
  Signal Layer 2 w4.5: v2(316,1889.76) 316.76,1889.76 353,1926 372.06,1926 546.88,1751.18 546.88,1575.12 577,1545 598,1545 607,1536 607,1377.38 622.38,1362 660.1,1362 688.25,1333.85 839.41,1333.85 854.66,1318.6 v1(855.65,1318.6)
  Bottom Layer w4.7: J2.8@236.22,1889.76 v2(316,1889.76) ; v2(627.39,1385.85) 667.15,1385.85 687.56,1365.44 799.01,1365.44 808.81,1355.65 808.81,1343.73 817.8,1334.74 830.26,1334.74 846.4,1318.6 v1(855.65,1318.6)
I2C3-SDA: J2.6 R17.2 U3.T3 | length 1212
  Top Layer w4.7: R17.2@562.42,1338.6 579.77,1355.95 610.04,1355.95 v2(627.39,1338.6)
  Top Layer w7: v1(729.67,1287.1) U3.T3@745.42,1302.85
  Signal Layer 2 w4.5: v2(359.45,1909.45) 376.59,1909.45 538.38,1747.66 538.38,1563.62 564,1538 564,1320 581.65,1302.35 714.42,1302.35 v1(729.67,1287.1)
  Bottom Layer w4.7: J2.6@236.22,1909.45 v2(359.45,1909.45) ; v2(627.39,1338.6) 662.74,1303.25 713.52,1303.25 v1(729.67,1287.1)
IO1: J3.41 U3.P24 | length 2314.3
  Top Layer w10: U3.P24@1406.84,1365.84 v1(1422.59,1350.08)
  Signal Layer 1 w4.5: v1(1422.59,1350.08) 1554.75,1350.08 1574.5,1330.33 1574.5,1318.27 1601.85,1290.92 1601.85,1280.54 1628.14,1254.25 1650.83,1254.25 1673.33,1231.75 2164.38,1231.75 2282.63,1350 2490,1350 2521.35,1318.65 2521.35,1145.25 2499.59,1123.49 2499.59,1058.5 2469.1,1028.01 2469.1,1018.1 ; v2(2280,472.44) 2349.6,472.44 2375.5,498.34 2375.5,890.84 2469,984.34 2469,1018.1
  Bottom Layer w4.7: v2(2280,472.44) J3.41@2362.2,472.44
IO2: J3.51 U3.P22 | length 2586.3
  Top Layer w10: U3.P22@1343.84,1365.84 v1(1359.59,1350.09)
  Signal Layer 1 w4.5: v1(1359.59,1350.09) 1359.59,1374.85 1378.74,1394 1576,1394 1600.43,1369.57 1600.43,1334.57 1631.25,1303.75 1631.25,1289.06 1640.56,1279.75 1661.39,1279.75 1683.89,1257.25 2154.03,1257.25 2273.78,1377 2499,1377 2546.7,1329.3 2546.7,1134.75 2524.94,1112.99 2524.94,1048 2494.45,1017.51 2494.45,963.74 2451,920.29 2451,865 2465,851 2465,402.7 2458.3,396 2374,396 2352.02,374.02 v2(2311.02,374.02)
  Bottom Layer w4.7: v2(2311.02,374.02) J3.51@2362.2,374.02
IO3: J3.43 U3.P23 | length 2345.8
  Top Layer w10: U3.P23@1375.34,1365.84 v1(1391.09,1350.08)
  Signal Layer 1 w4.5: v1(1391.09,1350.08) 1414.01,1373 1558,1373 1583,1348 1583,1323.4 1610.35,1296.05 1610.35,1284.06 1631.66,1262.75 1654.35,1262.75 1676.85,1240.25 2160.93,1240.25 2279.68,1359 2493,1359 2529.8,1322.2 2529.8,1141.75 2508.04,1119.99 2508.04,1055 2477.55,1024.51 2477.55,1010.34 ; v2(2311.02,452.76) 2350.76,452.76 2384,486 2384,885 2477.5,978.5 2477.5,1010.34
  Bottom Layer w4.7: v2(2311.02,452.76) J3.43@2362.2,452.76
IO4: J3.53 U3.P21 | length 2737.6
  Top Layer w10: U3.P21@1312.35,1365.84 v1(1328.1,1350.09)
  Signal Layer 1 w4.5: v1(1328.1,1350.09) 1328.1,1381.59 1349.51,1403 1585,1403 1613,1375 1613,1338 1638.25,1312.75 1654.94,1312.75 1701.94,1265.75 2150.58,1265.75 2270.23,1385.4 2502.6,1385.4 2555.15,1332.85 2555.15,1131.25 2533.39,1109.49 2533.39,1002.39 2502.9,971.9 2502.9,947.1 2521,929 2521,880.14 2476,835.14 2476,362 2468.33,354.33 v2(2281,354.33)
  Bottom Layer w4.7: v2(2281,354.33) J3.53@2362.2,354.33
IO5: J3.49 U3.P20 | length 2599
  Top Layer w10: U3.P20@1280.85,1365.84 v1(1296.6,1350.09)
  Signal Layer 1 w4.5: v1(1296.6,1350.09) 1311.85,1334.84 1365.9,1334.84 1375.84,1344.78 1375.84,1368.2 1390.65,1383 1561,1383 1591.5,1352.5 1591.5,1330.77 1622.25,1300.02 1622.25,1285.33 1636.33,1271.25 1657.87,1271.25 1680.37,1248.75 2157.48,1248.75 2276.73,1368 2496,1368 2538.25,1325.75 2538.25,1138.25 2516.49,1116.49 2516.49,1051.5 2486,1021.01 2486,967.5 2392.5,874 2392.5,451.5 2334.7,393.7 v2(2281,393.7)
  Bottom Layer w4.7: v2(2281,393.7) J3.49@2362.2,393.7
IO6: J3.37 U3.R25 | length 2220.2
  Top Layer w10: U3.R25@1438.33,1334.35 v1(1454.08,1318.6)
  Signal Layer 1 w4.5: v1(1454.08,1318.6) 1542.44,1318.6 1584.5,1276.53 1584.5,1273.12 1623.84,1233.78 1640.22,1233.78 1687.99,1186.01 2165.72,1186.01 2186.53,1206.82 2186.53,1230 2288.53,1332 2484,1332 2504.45,1311.55 2504.45,1152.25 2482.69,1130.49 2482.69,1065.5 2452.1,1034.91 ; v2(2280,511.81) 2336.81,511.81 2358.5,533.5 2358.5,901.48 2452,994.98 2452,1034.91
  Bottom Layer w4.7: v2(2280,511.81) J3.37@2362.2,511.81
IO7: J3.39 U3.R23 | length 2242.2
  Top Layer w10: U3.R23@1375.34,1334.35 v1(1391.09,1318.6)
  Signal Layer 1 w4.5: v1(1391.09,1318.6) 1406.34,1333.85 1546.9,1333.85 1593.35,1287.4 1593.35,1276.29 1623.89,1245.75 1643.91,1245.75 1667.66,1222 2166.58,1222 2285.58,1341 2487,1341 2512.9,1315.1 2512.9,1148.75 2491.14,1126.99 2491.14,1062 2460.55,1031.41 2460.55,1018.1 ; v2(2311.02,492.13) 2347.13,492.13 2367,512 2367,895 2460.5,988.5 2460.5,1018.1
  Bottom Layer w4.7: v2(2311.02,492.13) J3.39@2362.2,492.13
IO8: J3.35 U3.R24 | length 2140.5
  Top Layer w10: U3.R24@1406.84,1334.35 v1(1422.59,1318.6)
  Signal Layer 1 w4.5: v1(1422.59,1318.6) 1438.34,1302.85 1498.08,1302.85 1522.43,1278.5 1566.83,1278.5 1620.55,1224.78 1636.5,1224.78 1683.76,1177.51 2172.51,1177.51 2201,1206 2201,1232.52 2291.48,1323 2481,1323 2496,1308 2496,1155.75 2474.24,1133.99 2474.24,1069 2448.6,1043.36 2448.5,1043.36 2443.55,1038.41 ; v2(2311.02,531.5) 2349,569.47 2349,904 2443.5,998.5 2443.5,1038.41
  Bottom Layer w4.7: v2(2311.02,531.5) J3.35@2362.2,531.5
JTAG-TCK: J2.13 U3.H5 | length 991.7
  Top Layer w10: v1(792.66,1539.07) U3.H5@808.41,1554.82
  Signal Layer 1 w4.5: 574,1642 596,1642 620.14,1617.86 689.14,1617.86 752,1555 776.73,1555 v1(792.66,1539.07)
  Signal Layer 1 w10: v2(35.43,1830.71) 106.09,1760.05 123.77,1760.05 181.82,1702 214.76,1702 244.31,1731.55 301.45,1731.55 321.14,1711.86 493.52,1711.86 563.39,1642 574,1642
  Bottom Layer w10: v2(35.43,1830.71) J2.13@102.36,1830.71
JTAG-TDI: J2.9 R22.1 U3.G5 | length 1329.8
  Top Layer w10: v1(792.66,1570.57) U3.G5@808.41,1586.32
  Signal Layer 1 w4.5: 566.61,1667.81 581.31,1653.11 605.27,1653.11 627.38,1631 692,1631 737.23,1585.77 767.96,1585.77 783.16,1570.57 v1(792.66,1570.57)
  Signal Layer 1 w10: v2(35.43,1870.08) 98.65,1870.08 190.72,1778 287,1778 312.3,1752.7 481.72,1752.7 566.61,1667.81
  Bottom Layer w4.7: R22.1@562.42,1574.82 563.89,1574.82 646.57,1492.15 798.94,1492.15 808.01,1501.21 808.01,1555.22 v1(792.66,1570.57)
  Bottom Layer w10: v2(35.43,1870.08) J2.9@102.36,1870.08
JTAG-TDO: J2.7 U3.G6 | length 894.3
  Top Layer w7: v1(824.16,1602.07) U3.G6@839.91,1586.32
  Signal Layer 1 w4.5: 668.1,1692 678.79,1681.3 797.92,1681.3 807.86,1671.36 807.86,1650.96 824.16,1634.66 v1(824.16,1602.07)
  Signal Layer 1 w10: v2(153.54,1889.76) 232.31,1811 503,1811 622,1692 668.1,1692
  Bottom Layer w10: J2.7@102.36,1889.76 v2(153.54,1889.76)
JTAG-TMS: J2.1 R21.1 U3.C3 | length 1125.7
  Top Layer w4.7: R21.1@562.42,1669.31 562.42,1690.96 611.64,1740.18 654.95,1740.18 666.67,1728.45 729.27,1728.45 v1(729.67,1728.05) U3.C3@745.42,1712.3
  Signal Layer 1 w4.5: 706,1814 714.42,1805.58 714.42,1743.3 v1(729.67,1728.05)
  Signal Layer 1 w10: v2(35.43,1948.82) 201.18,1948.82 240.55,1909.45 332.65,1909.45 351.6,1890.5 549.29,1890.5 625.79,1814 706,1814
  Bottom Layer w10: v2(35.43,1948.82) J2.1@102.36,1948.82
JTAG-TRST: J2.3 R23.1 U3.C2 | length 862.9
  Top Layer w4.7: v2(588.02,1669.31) 615.25,1696.55 v1(698.17,1696.55) ; v1@698.49,1696.87 U3.C2@713.92,1712.3
  Signal Layer 1 w10: v2(153.54,1929.13) 211.86,1870.81 337.19,1870.81 359,1849 548.97,1849 698.17,1699.8 v1(698.17,1696.55)
  Bottom Layer w4.7: R23.1@562.42,1669.31 v2(588.02,1669.31)
  Bottom Layer w10: J2.3@102.36,1929.13 v2(153.54,1929.13)
KEY-VOL-DN: J3.57 U3.R4 | length 3567.4
  Top Layer w7: v1(761.17,1318.6) U3.R4@776.92,1334.35
  Signal Layer 1 w4.5: v2(489.47,1260) 489.47,1274.13 512.34,1297 638.4,1297 666.4,1325 707,1325 716.84,1334.84 737.29,1334.84 753.53,1318.6 v1(761.17,1318.6)
  Bottom Layer w4.7: v2(489.47,1260) 489.47,1201.14 527.75,1162.86 527.75,1097.45 437,1006.7 437,639 477,599 477,252.41 673.41,56 2163,56 2277,170 2277,299.66 2292.3,314.96 J3.57@2362.2,314.96
KEY-VOL-UP: J3.55 U3.R6 | length 3812.7
  Top Layer w7: v1(824.16,1318.6) U3.R6@839.91,1334.35
  Signal Layer 1 w4.5: v2(459,1260) 459,1287 478.25,1306.25 631.25,1306.25 661,1336 694.01,1336 723.35,1365.34 735.98,1365.34 744.92,1356.41 744.92,1344.77 754.85,1334.84 807.92,1334.84 v1(824.16,1318.6)
  Bottom Layer w4.7: v2(459,1260) 459,1219.3 519.05,1159.25 519.05,1101.05 426,1008 426,630 468,588 468,249.11 672.11,45 2174.48,45 2383.41,253.94 2404.94,253.94 2410,259 2421.73,270.73 2421.73,322.25 2409.33,334.65 2398.71,334.65 J3.55@2362.2,334.65
LCD-BL_PWM: J2.23 U3.F18 | length 2227.6
  Top Layer w10: U3.F18@1217.86,1617.81 v1(1233.61,1633.56)
  Signal Layer 2 w4.5: v2(187,1723.62) 204.62,1723.62 227.75,1746.75 227.75,1930.88 304.75,2007.87 440.52,2007.87 464.15,2031.5 981.85,2031.5 1009.35,2004 1360,2004 1404.57,2048.57 v2(1450,2048.57)
  Bottom Layer w4.7: J2.23@102.36,1732.28 178.34,1732.28 v2(187,1723.62) ; v1(1233.61,1633.56) 1218.26,1648.91 1218.26,1921.26 1358,2061 1437.57,2061 v2(1450,2048.57)
LCD-PWREN: J2.19 U3.A17 | length 1981.9
  Top Layer w4.7: U3.A17@1186.36,1775.29 1186.36,1795.36 1312,1921 1312,2027.16 1370,2085.16 v2(1370,2131)
  Signal Layer 2 w4.5: v2(149.57,1779) 149.57,1819.57 170,1840 170,2012.85 233.15,2076 873.19,2076 883.64,2065.55 920.13,2065.55 ; v2(1370,2131) 1302.1,2131 1246.6,2075.5 1000.33,2075.5 990.41,2065.59 920.17,2065.59 ; 920.13,2065.55 920.17,2065.59
  Bottom Layer w4.7: J2.19@102.36,1771.65 142.23,1771.65 v2(149.57,1779)
LVDS0-CLK_N: J2.33 U3.V4 | length 1250.8
  Top Layer w7: v1(761.17,1224.11) U3.V4@776.92,1239.86
  Signal Layer 1 w3.8: v2(153.54,1637.83) 151.72,1636 105,1636 60,1591 60,1328 231,1157 546.67,1157 556.67,1167 597.67,1208 745.05,1208 v1(761.17,1224.11)
  Bottom Layer w3.7: J2.33@102.36,1633.86 149.57,1633.86 v2(153.54,1637.83)
LVDS0-CLK_P: J2.35 U3.V3 | length 1250.6
  Top Layer w7: v1(729.67,1224.11) U3.V3@745.42,1239.86
  Signal Layer 1 w3.8: v2(153.54,1610.2) 136.75,1627 108.73,1627 101.73,1620 101.73,1613.22 110,1604.95 110,1598.7 104.03,1592.73 98.27,1592.73 89.52,1601.48 83.21,1601.48 69,1587.27 69,1576 74,1571 83.5,1571 88,1566.5 88,1558 83,1553 73,1553 69,1549 69,1331.73 234.73,1166 542.94,1166 593.94,1217 722.55,1217 v1(729.67,1224.11)
  Bottom Layer w3.7: J2.35@102.36,1614.17 149.58,1614.17 v2(153.54,1610.2)
LVDS0-TX0_N: J2.51 U3.U2 | length 1251
  Top Layer w3.7: v2(153.54,1460.66) 144.23,1451.35 137.27,1451.35 124.86,1438.94 124.86,1377.27 151.13,1351 198.73,1351 223.73,1376 252.73,1376 267,1390.27 267,1408.73 249.73,1426 223.73,1426 214,1435.73 214,1447.8 240.2,1474 280,1474 306.2,1447.8 328.2,1447.8 338,1438 338,1409.73 305,1376.73 305,1350.86 266,1311.86 266,1270.27 289.27,1247 367.27,1247 391.27,1223 529.74,1223 561.55,1254.81 686.88,1254.81 703.32,1271.25 713.81,1271.25 U3.U2@713.92,1271.36
  Bottom Layer w3.7: J2.51@102.36,1456.69 149.57,1456.69 v2(153.54,1460.66)
LVDS0-TX0_P: J2.53 U3.U1 | length 1250.4
  Top Layer w3.7: v2(153.54,1433.04) 144.23,1442.35 141,1442.35 133.86,1435.21 133.86,1381 154.86,1360 195,1360 220,1385 249,1385 258,1394 258,1405 246,1417 220,1417 205,1432 205,1451.53 225.47,1472 235.55,1482.08 284.65,1482.08 294.73,1472 309.93,1456.8 331.93,1456.8 347,1441.73 347,1406 314,1373 314,1347.13 275,1308.13 275,1274 293,1256 371,1256 395,1232 421,1232 426,1237 426,1259 430.81,1263.81 438.19,1263.81 443.2,1258.8 443.2,1240.8 452,1232 468,1232 480.2,1244.2 494.8,1244.2 507,1232 526.01,1232 533.01,1238.99 533.01,1248.01 542,1257 551.01,1257 557.82,1263.81 674.88,1263.81 U3.U1@682.43,1271.36
  Bottom Layer w3.7: J2.53@102.36,1437.01 149.58,1437.01 v2(153.54,1433.04)